# Altium PCB iot.PcbDoc
Units mm, origin at the board's own origin, x right, y up, seen from the top; angles counter-clockwise.
Board outline 90 x 70 mm, 2 copper layers (Top Layer, Bottom Layer); 47 components, 55 nets, 173 pads, 0 vias.
Unrouted connection lines stored in the file: 101.
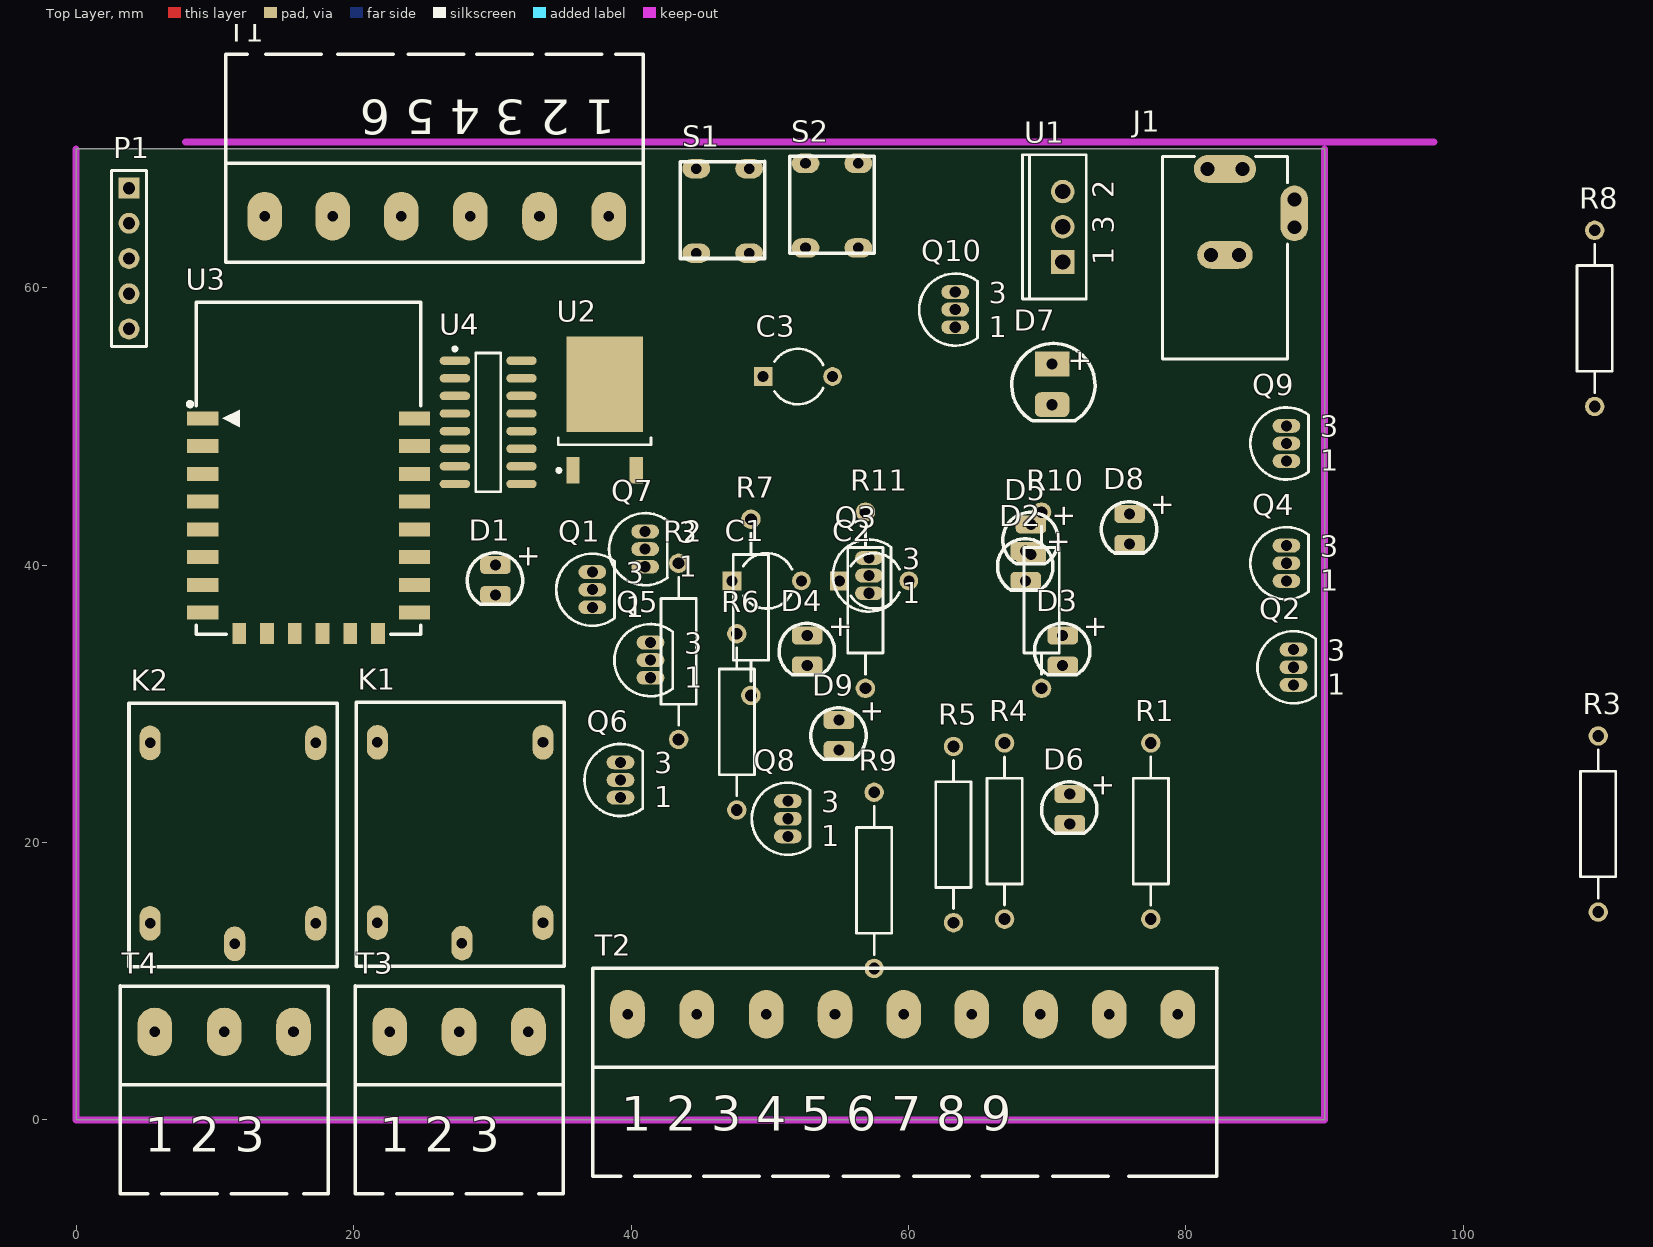
[diagram p0: Top Layer view]
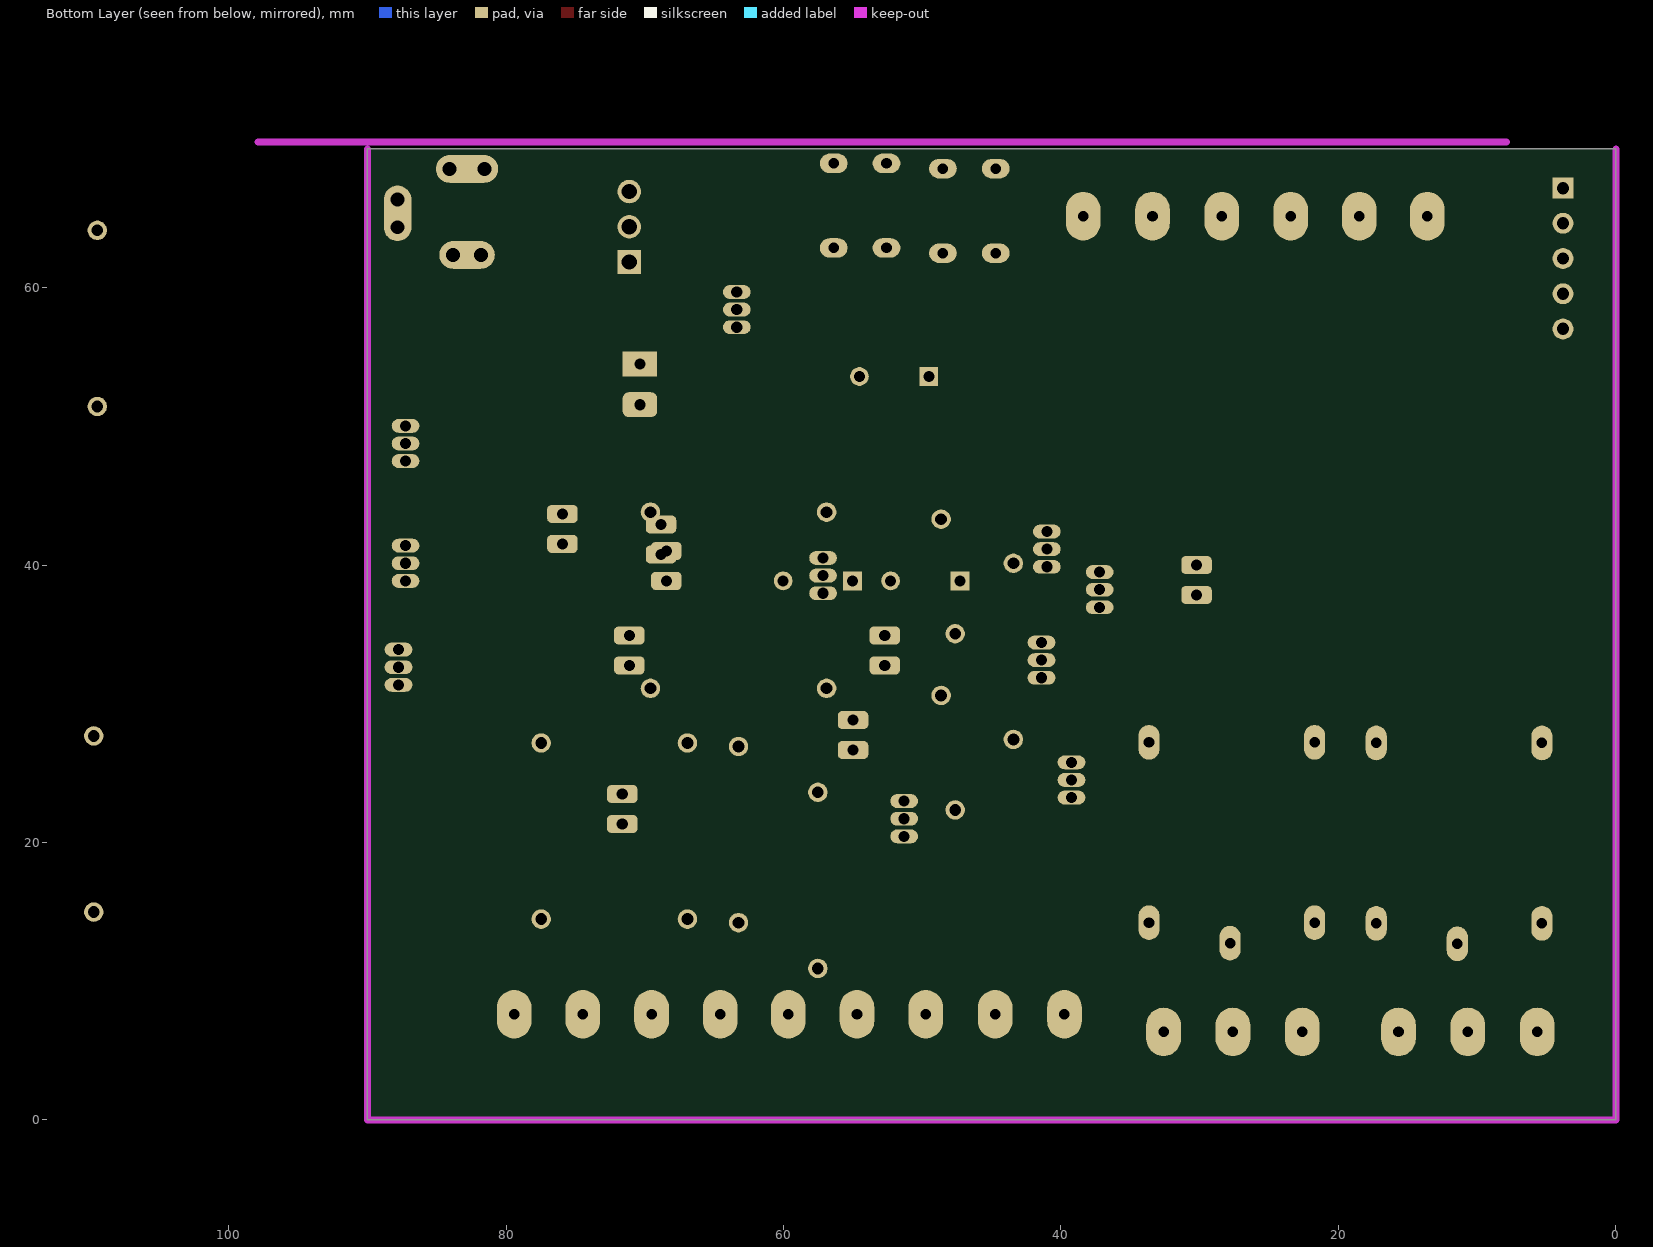
[diagram p1: Bottom Layer view, seen from below]

## Layer stack, top to bottom
Top Solder: solder mask 0.0102, Solder Resist, Dk 3.5
Top Layer: signal copper 0.0356
Dielectric 1: dielectric 0.32, FR-4, Dk 4.8
Bottom Layer: signal copper 0.0356
Bottom Solder: solder mask 0.0102, Solder Resist, Dk 3.5

## Board outline
0,0 90,0 90,70 0,70

## Design rules (kind name [scope] priority, off if disabled: settings)
Clearance [All] p1: gap=0.254 ignorepadtopadclearanceinfootprint=FALSE except(0: Arc-Hole Track-Hole SMDPad-Hole THPad-Hole Via-Hole Fill-Hole Poly-Hole Region-Hole Text-Hole)
PolygonConnect [All] p1: connectstyle=Relief reliefconductorwidth=0.254 reliefentries=4 polygonreliefangle="90 Angle" airgapwidth=0.254
RoutingLayers [All] p1: top layer_v5=FALSE bottom layer_v5=TRUE
RoutingVias [All] p1: holewidth=0.711 width=1.27 viastyle="Through Hole" minholewidth=0.711 minwidth=1.27 maxholewidth=0.711 maxwidth=1.27
SolderMaskExpansion [All] p1: expansion=0.102
Width [All] p1: maxlimit=1 minlimit=0.5 preferedwidth=0.7
29 further rules are at their usual default settings.

## Components (designator, comment, footprint, x,y, rotation, side; value= is the part's Value field where it differs from the comment)
C1 "Cap2" CAPR5-4X5 49.784,38.862 r0 top value=100pF
C2 "Cap2" CAPR5-4X5 57.531,38.862 r0 top value=100pF
C3 "Cap2" CAPR5-4X5 52.03,53.594 r0 top value=100pF
D1 "LED 3mm" LED-3mm 30.099,38.989 r0 top
D2 "LED 3mm" LED-3mm 68.326,40.005 r0 top
D3 "LED 3mm" LED-3mm 70.993,33.909 r0 top
D4 "LED 3mm" LED-3mm 52.578,33.909 r0 top
D5 "LED 3mm" LED-3mm 68.707,41.91 r0 top
D6 "LED 3mm" LED-3mm 71.501,22.479 r0 top
D7 "MODEL" LED-5mm 70.358,53.086 r0 top
D8 "LED 3mm" LED-3mm 75.819,42.672 r0 top
D9 "LED 3mm" LED-3mm 54.864,27.813 r0 top
J1 "PWR2.5" KLD-0202 82.82,54.857 r90 top
K1 "Relay-05vDC" Relays 20.193,11.097 r0 top
K2 "Relay-05vDC" Relays 3.81,11.049 r0 top
P1 "Header 5" HDR1X5 3.81,67.183 r270 top
Q1 "BC556" 29-04 37.211,38.227 r0 top
Q2 "BC556" 29-04 87.757,32.639 r0 top
Q3 "BC556" 29-04 57.15,39.243 r0 top
Q4 "BC556" 29-04 87.249,40.132 r0 top
Q5 "BC556" 29-04 41.402,33.147 r0 top
Q6 "BC556" 29-04 39.243,24.511 r0 top
Q7 "BC556" 29-04 41.021,41.148 r0 top
Q8 "BC556" 29-04 51.308,21.717 r0 top
Q9 "BC556" 29-04 87.249,48.768 r0 top
Q10 "BC556" 29-04 63.373,58.42 r0 top
R1 "Res Semi" AXIAL-0.5 77.47,20.828 r90 top value=1K
R2 "Res Semi" AXIAL-0.5 43.434,33.782 r90 top value=1K
R3 "Res Semi" AXIAL-0.5 109.728,21.336 r90 top value=1K
R4 "Res Semi" AXIAL-0.5 66.929,20.828 r90 top value=1K
R5 "Res Semi" AXIAL-0.5 63.246,20.574 r90 top value=1K
R6 "Res Semi" AXIAL-0.5 47.625,28.702 r90 top value=1K
R7 "Res Semi" AXIAL-0.5 48.641,36.957 r90 top value=1K
R8 "Res Semi" AXIAL-0.5 109.474,57.785 r90 top value=1K
R9 "Res Semi" AXIAL-0.5 57.531,17.272 r90 top value=1K
R10 "Res Semi" AXIAL-0.5 69.596,37.465 r90 top value=1K
R11 "Res Semi" AXIAL-0.5 56.896,37.465 r90 top value=1K
S1 "PB-4pin" PB-4pin 49.657,62.103 r90 top
S2 "PB-4pin" PB-4pin 57.531,62.484 r90 top
T1 "Phoenix terminal" "phoenix terminal 6" 40.894,76.835 r180 top
T2 "Phoenix terminal" "phoenix terminal 9" 37.258,-4.064 r0 top
T3 "Phoenix terminal" "phoenix terminal 3" 20.113,-5.334 r0 top
T4 "Phoenix terminal" "phoenix terminal 3" 3.175,-5.334 r0 top
U1 "L7805ABV" TO220ABN 71.12,64.389 r90 top
U2 "LM1117DT-3.3" TD03B_N 38.1,51.181 r90 top
U3 "ESP_12_E" ESP_12_E 8.759,50.577 r0 top
U4 "SN74HC595D" D016_N 29.705,50.292 r0 top

## Footprints (in the part's own frame and the unit in brackets; to place one, negate y for a bottom-side part, rotate by r counter-clockwise, add the part's x,y. Pads: shape width x height; smd on the part's side, far side on the other; paste and mask are expansions set on the pad)
29-04 [mm] "TO, Flat Index; 3 In-Line, Axial Leads; Body Dia. 4.8mm; Leads 0.48 x 0.5 mm (max)"
  oval 2x1 hole 0.8: 1(0,-1.27) 2(0,0) 3(0,1.27)
  silkscreen extent -2.6,-2.6 1.6,2.6
AXIAL-0.5 [mm] "Axial Device, Thru-Hole; 2 Leads; 0.5 in Pin Spacing"
  round 1.4 hole 0.85: 1(-6.35,0) 2(6.35,0)
  silkscreen extent -5.33,-1.27 5.33,1.27
CAPR5-4X5 [mm] "Capacitor; 2 Leads"
  rect 1.35x1.35 hole 0.8: 1(-2.5,0)
  round 1.35 hole 0.8: 2(2.5,0)
  silkscreen extent -1.69,-2 1.82,2
D016_N [mm] "SOIC, 16-Leads, Body 9.9x3.9mm, Pitch 1.27mm, IPC Medium Density"
  oval 2.2x0.6 smd: 1(-2.4,4.445) 2(-2.4,3.175) 3(-2.4,1.905) 4(-2.4,0.635) 5(-2.4,-0.635) 6(-2.4,-1.905) 7(-2.4,-3.175) 8(-2.4,-4.445) 9(2.4,-4.445) 10(2.4,-3.175) 11(2.4,-1.905) 12(2.4,-0.635) 13(2.4,0.635) 14(2.4,1.905) 15(2.4,3.175) 16(2.4,4.445)
  silkscreen extent -2.52,-5 0.9,5.42, body extent -1.95,-4.95 1.95,4.95, height 1.75
ESP_12_E [mm] "ESP-12 Wi-Fi Module by AI-Thinker"
  rect 2.25x1 smd: 1(0.375,0) 2(0.375,-2) 3(0.375,-4) 4(0.375,-6) 5(0.375,-8) 6(0.375,-10) 7(0.375,-12) 8(0.375,-14) 15(15.625,-14) 16(15.625,-12) 17(15.625,-10) 18(15.625,-8) 19(15.625,-6) 20(15.625,-4) 21(15.625,-2) 22(15.625,0)
  rect 1x1.5 smd: 9(3,-15.5) 10(5,-15.5) 11(7,-15.5) 12(9,-15.5) 13(11,-15.5) 14(13,-15.5)
  silkscreen extent -0.7,-15.57 16.08,8.37, body extent 0,-15.49 16,8.51, height 2.75
HDR1X5 [mm] "Connector; Header; 5 Position"
  rect 1.5x1.5 hole 0.9: 1(0,0)
  round 1.5 hole 0.9: 2(2.54,0) 3(5.08,0) 4(7.62,0) 5(10.16,0)
  silkscreen extent -1.27,-1.27 11.43,1.27
KLD-0202 [mm] "DC Power Jack, 2.5mm, KLD Series, PCB Mount"
  oval 2x4.5 all layers, no hole: 1(13.7,0)
  round 1.5 hole 1: 1A(13.7,-1.25) 1B(13.7,1.25) 2A(7.5,-1) 2B(7.5,1) 3A(9.5,-5) 3B(11.5,-5)
  oval 2x4 all layers, no hole: 2(7.5,0)
  oval 4x2 all layers, no hole: 3(10.5,-5)
  silkscreen extent 0,-4.5 14.6,4.5
LED-3mm [mm] "LED; 2 Leads"
  rrect50% 2.2x1.3 hole 0.8: 1(0.127,1.016) 2(0.127,-1.143)
  silkscreen extent -1.9,-1.81 2.09,1.89
LED-5mm [mm] "LED; 2 Leads"
  rect 2.5x1.8 hole 0.8: 1(0,1.397)
  rrect50% 2.5x1.8 hole 0.8: 2(0,-1.524)
  silkscreen extent -2.91,-2.67 3.09,2.9
PB-4pin [mil] "Switch"
  oval 55.12x78.74 hole 30: 1(15,195) 2(255,195) 3(15,45) 4(255,45)
  silkscreen extent 0,0 276,240
"phoenix terminal 3" [mil] "3 terminals"
  oval 98.43x137.8 hole 30: 1(98.15,460) 2(295,460) 3(491.85,460)
  silkscreen extent 0,0 591,591
"phoenix terminal 6" [mil] "6 terminals"
  oval 98.43x137.8 hole 30: 1(98.15,460) 2(295,460) 3(491.85,460) 4(686.85,460) 5(881.85,460) 6(1075,460)
  silkscreen extent 0,0 1185,591
"phoenix terminal 9" [mil] "9 terminals"
  oval 98.43x137.8 hole 30: 1(98.15,460) 2(295,460) 3(491.85,460) 4(686.85,460) 5(881.85,460) 6(1075,460) 7(1270,460) 8(1465,460) 9(1660,460)
  silkscreen extent 0,0 1772,591
Relays [mil]
  oval 60x98.43 hole 30: 1(300,65) 2(60,635) 3(530,635) 4(60,123.11) 5(530,123.11)
  silkscreen extent 0,0 591,748
TD03B_N [mm] "D-PAK, 4-Leads, Body 6.1x6.6mm, Pitch 2.29mm, Lead Span 9.7mm, IPC Medium Density"
  rect 1.9x0.95 smd: 1(-4.35,2.28) 3(-4.35,-2.28)
  rect 6.9x5.5 smd: 4(1.85,0)
  silkscreen extent -4.47,-3.35 -2,3.43, body extent -2.5,-3.35 3.7,3.35, height 2.38
TO220ABN [mm] "TO, Thru-Hole, Vertical, Heatsink Mounted; 3 In-Line Leads; Pitch 2.54 mm; Pin sequence 1, 3, 2"
  rect 1.7x1.7 hole 1.1: 1(-2.54,0)
  round 1.7 hole 1.1: 2(2.54,0) 3(0,0)
  silkscreen extent -5.2,-1.7 5.2,2.9

## Part data
C1 C2 C3: "Capacitor", PackageDescription="Capacitor; 2 Leads", PackageReference=CAPR5-4X5, Published=23-Sep-2002, Publisher="Altium Limited"
D1 D2 D3 D4 D5 D6 D8 D9: "Typical LED", Designer="Seyed Mohsen Ghasemian", PackageDescription="LED; 2 Leads", PackageReference=LED, Published=02/04/2012, Publisher=www.picpars.com
D7: library part "LED 5mm", "Typical LED", COLOR=RED
J1: "Low Voltage Power Supply Connector", ComponentLink1Description="Manufacturer Link", ComponentLink1URL=http://domino.kycon.com/internet/Products.html, DatasheetDocument=09-May-2002, Published=17-Dec-2003, Publisher="Altium Limited"
K1 K2: "Relay-05vDC-240AC 5A", ComponentLinkURL=www.picpars.com, Designer="Seyed Mohsen Ghasemain"
P1: "Header, 5-Pin", LatestRevisionDate=17-Jul-2002, LatestRevisionNote="Re-released for DXP Platform.", Publisher="Altium Limited"
Q1 Q2 Q3 Q4 Q5 Q6 Q7 Q8 Q9 Q10: "Amplifier Transistor PNP Silicon", ComponentLink1Description="Manufacturer Link", ComponentLink1URL=http://www.onsemi.com/site/products/landing?taxonomyID=194, ComponentLink2Description=Datasheet, ComponentLink2URL=http://www.onsemi.com/pub/Collateral/BC556B-D.PDF, DatasheetVersion=1991, LatestRevisionDate=17-Jul-2002, LatestRevisionNote="Re-released for DXP Platform.", PackageDescription="TO, Flat Index; 3 In-Line, Axial Leads; Body Dia. 4.8mm; Leads 0.48 x 0.5 mm (max)", PackageReference=29-04, PackageVersion=1996, Published=29-Sep-2000, Publisher="Altium Limited"
R1 R2 R3 R4 R5 R6 R7 R8 R9 R10 R11: "Semiconductor Resistor", LatestRevisionDate=17-Jul-2002, LatestRevisionNote="Re-released for DXP Platform.", PackageDescription="Axial Device, Thru-Hole; 2 Leads; 0.5 in Pin Spacing", PackageReference=AXIAL-0.5, Published=8-Jun-2000, Publisher="Altium Limited"
S1 S2: "Switch", Designer="Seyed Mohsen Ghasemian", E-mail=picpars@gmail.com, Publisher=www.picpars.com, WEB=www.picpars.com
T1: library part "Phoenix terminal 6", "Terminal 6 Pin", ComponentLinkURL=www.picpars.com, Designer="Seyed Mohsen Ghasemain", E-mail=picpars@gmail.com
T2: library part "Phoenix terminal 9", "Terminal 9 Pin", ComponentLinkURL=www.picpars.com, Designer="Seyed Mohsen Ghasemain", E-mail=picpars@gmail.com
T3 T4: library part "Phoenix terminal 3", "Terminal 3 Pin", ComponentLinkURL=www.picpars.com, Designer="Seyed Mohsen Ghasemain", E-mail=picpars@gmail.com
U1: "Precision 1A Regulator", ComponentLink1Description="Manufacturer Link", ComponentLink1URL=http://www.st.com/, ComponentLink2Description=Datasheet, ComponentLink2URL=http://www.st.com/stonline/products/literature/ds/2144/l7805ab.pdf, DatasheetVersion=Nov-1999, LatestRevisionDate=17-Jul-2002, LatestRevisionNote="Re-released for DXP Platform.", Note="Tab is connected to pin 3 (GND).", PackageDescription="TO, Thru-Hole, Vertical, Heatsink Mounted; 3 In-Line Leads; Pitch 2.54 mm; Pin sequence 1, 3, 2", PackageReference=TO220ABN, PackageVersion=Jun-1998, Published=24-Aug-2001, Publisher="Altium Limited"
U2: "800mA Low-Dropout Linear Regulator", DigiKeyPartNumber=LM1117DT-3.3-ND, Manufacturer="National Semiconductor", PackageTopMarking=NSUZXYTT*LM1117*DT-3.3, PowerWise=N, Code_JEDEC=TO-252-AA, ComponentLink1Description="LM1117 Datasheet", ComponentLink1URL=http://www.national.com/ds/LM/LM1117.pdf, ComponentLink2Description="LM1117 Web Page", ComponentLink2URL=http://www.national.com/pf/LM/LM1117.html, ComponentLink3Description="TD03B Package Page", ComponentLink3URL=http://www.national.com/packaging/folders/td03b.html, CompType="LDO IC", DatasheetVersion=Apr-2006, PackageDescription="TO252, Molded, Jedec, 6.8 x 6.10 x 2.30mm Body, 3 Lead, 2.28mm Pitch, Surface Mount", PackageReference=TD03B, PackageVersion="revC, Apr-2003", PartNumber=LM1117DT-3.3, PinCount=3, Published=4-Dec-2008, Publisher="Altium Limited", RoHS=O
U3: "ESP-12 Wi-Fi Module by AI-Thinker", IC=ESP8266-EX, Vendor=Ai-thinker
U4: "8-Bit Shift Register with 3-State Output Registers", Code_IPC=SOIC127P600-16, ComponentLink1Description="Manufacturer Link", ComponentLink1URL=http://www.ti.com/, ComponentLink2Description=Datasheet, ComponentLink2URL=http://www-s.ti.com/sc/ds/sn74hc595.pdf, DatasheetVersion=May-1997, LatestRevisionDate=13-Apr-2006, LatestRevisionNote="IPC-7351 Footprint Added.", PackageDescription="16-Pin Small Outline Integrated Circuit 1.27 mm Pitch", PackageReference=D016, PackageVersion=Jan-1998, Published=8-Jun-2000, Publisher="Altium Limited"

## Nets (pads, with @x,y where several pads share a name; then routed paths per layer and width w, separated by ;. In a path a pad name is that pad's centre, name@x,y a point inside that pad or via, vN(x,y) a via of type N, cw(c..) or ccw(c..) an arc to the next point about the centre after c; other vN are vias at no path point)
3.3v: C3.2 D7.1 P1.5 U2.4 U3.3 U3.8
ADC: T1.1 U3.2
GND: C1.1 C2.1 C3.1 J1.2 J1.2A J1.2B J1.3 J1.3A J1.3B K2.5 P1.4 R1.2 S1.4 S2.4 T1.5 T2.9 U1.3 U2.1 U3.15 U4.8 U4.13
io0: S2.1 U3.18
io2: D7.2 U3.17
io4: U3.19 U4.14
io5: U3.20 U4.11
io9: R10.1 U3.11
io10: R7.1 U3.12
io12: T1.4 U3.6
io13: U3.7 U4.12
io14: T1.3 U3.5
io15: S1.1 U3.16
io16: T1.2 U3.4
led: D2.2 D3.2 D4.2 D5.2 D6.2 D8.2 D9.2
NetC1_2: C1.2 J1.1 J1.1A J1.1B U1.1
NetD1_1: D1.1 Q1.1 T2.1
NetD1_2: D1.2 R1.1
NetD2_1: D2.1 Q2.1 T2.2
NetD3_1: D3.1 Q3.1 T2.3
NetD4_1: D4.1 Q4.1 T2.4
NetD5_1: D5.1 Q5.1 T2.5
NetD6_1: D6.1 Q7.1 T2.6
NetD8_1: D8.1 Q8.1 T2.7
NetD9_1: D9.1 Q10.1 T2.8
NetK1_1: K1.1 T3.2
NetK1_2: K1.2 T3.1
NetK1_3: K1.3 T3.3
NetK1_4: K1.4 Q6.1
NetK2_1: K2.1 T4.2
NetK2_2: K2.2 T4.1
NetK2_3: K2.3 T4.3
NetK2_4: K2.4 Q9.1
NetQ1_2: Q1.2 R2.2
NetQ2_2: Q2.2 R3.2
NetQ3_2: Q3.2 R4.2
NetQ4_2: Q4.2 R5.2
NetQ5_2: Q5.2 R6.2
NetQ6_2: Q6.2 R7.2
NetQ7_2: Q7.2 R8.2
NetQ8_2: Q8.2 R9.2
NetQ9_2: Q9.2 R10.2
NetQ10_2: Q10.2 R11.2
NetR2_1: R2.1 U4.15
NetR3_1: R3.1 U4.1
NetR4_1: R4.1 U4.2
NetR5_1: R5.1 U4.3
NetR6_1: R6.1 U4.4
NetR8_1: R8.1 U4.5
NetR9_1: R9.1 U4.6
NetR11_1: R11.1 U4.7
res: P1.1 U3.1
RX: P1.3 U3.21
TX: P1.2 U3.22
VCC: C2.2 Q1.3 Q3.3 Q4.3 Q5.3 Q6.3 Q7.3 Q8.3 Q9.3 Q10.3 T1.6 U1.2 U2.3 U4.10 U4.16
pads on no net: K1.5 Q2.3 S1.2 S1.3 S2.2 S2.3 U3.9 U3.10 U3.13 U3.14 U4.9

## Keep-outs
Keep-Out Layer:
  lines w0.5: 0,70 0,0 90,0 90,70 ; 7.874,70.508 97.874,70.508

## Text inside footprints (layer, text, board x,y; h text height)
D1: Top Overlay "+" at 33.274,39.751 h1.52 r90
D2: Top Overlay "+" at 71.501,40.767 h1.52 r90
D3: Top Overlay "+" at 74.168,34.671 h1.52 r90
D4: Top Overlay "+" at 55.753,34.671 h1.52 r90
D5: Top Overlay "+" at 71.882,42.672 h1.52 r90
D6: Top Overlay "+" at 74.676,23.241 h1.52 r90
D7: Top Overlay "+" at 73.025,53.848 h1.52 r90
D8: Top Overlay "+" at 78.994,43.434 h1.52 r90
D9: Top Overlay "+" at 58.039,28.575 h1.52 r90
J1: Mechanical 1 "Mech 2 - Clearance, move to internal plane if present" at 77.754,55.143 h0.3 r90; Mechanical 1 "Mech 1 - Slot cut-out" at 77.254,55.143 h0.3 r90; Mechanical 1 "Assign keep-out area to slot" at 76.254,55.143 h0.3 r90; Mechanical 1 "Alert PCB fab to slot details" at 76.754,55.143 h0.3 r90
Q1: Top Overlay "3" at 39.632,38.694 h1.5; Top Overlay "1" at 39.632,36.248 h1.5
Q2: Top Overlay "3" at 90.178,33.106 h1.5; Top Overlay "1" at 90.178,30.66 h1.5
Q3: Top Overlay "3" at 59.571,39.71 h1.5; Top Overlay "1" at 59.571,37.264 h1.5
Q4: Top Overlay "3" at 89.67,40.599 h1.5; Top Overlay "1" at 89.67,38.153 h1.5
Q5: Top Overlay "3" at 43.823,33.614 h1.5; Top Overlay "1" at 43.823,31.168 h1.5
Q6: Top Overlay "3" at 41.664,24.978 h1.5; Top Overlay "1" at 41.664,22.532 h1.5
Q7: Top Overlay "3" at 43.442,41.615 h1.5; Top Overlay "1" at 43.442,39.169 h1.5
Q8: Top Overlay "3" at 53.729,22.184 h1.5; Top Overlay "1" at 53.729,19.738 h1.5
Q9: Top Overlay "3" at 89.67,49.235 h1.5; Top Overlay "1" at 89.67,46.789 h1.5
Q10: Top Overlay "3" at 65.794,58.887 h1.5; Top Overlay "1" at 65.794,56.441 h1.5
T1: Top Overlay "1 2 3 4 5 6" at 38.862,73.533 h2.5 r180
T2: Top Overlay "1 2 3 4 5 6 7 8 9" at 39.29,-0.762 h2.5
T3: Top Overlay "1 2 3" at 21.891,-2.286 h2.5
T4: Top Overlay "1 2 3" at 4.953,-2.286 h2.5
U1: Top Overlay "1" at 74.795,61.599 h1.5 r90; Top Overlay "2" at 74.795,66.429 h1.5 r90; Top Overlay "3" at 74.795,63.889 h1.5 r90
U3: Mechanical 13 "CUTOUT POLYGON" at 8.886,57.943 h0.25; Mechanical 13 "ANTENNA AREA" at 8.886,58.451 h0.25